# EAGLE board MOD1600-pan (EAGLE 7.2.0)
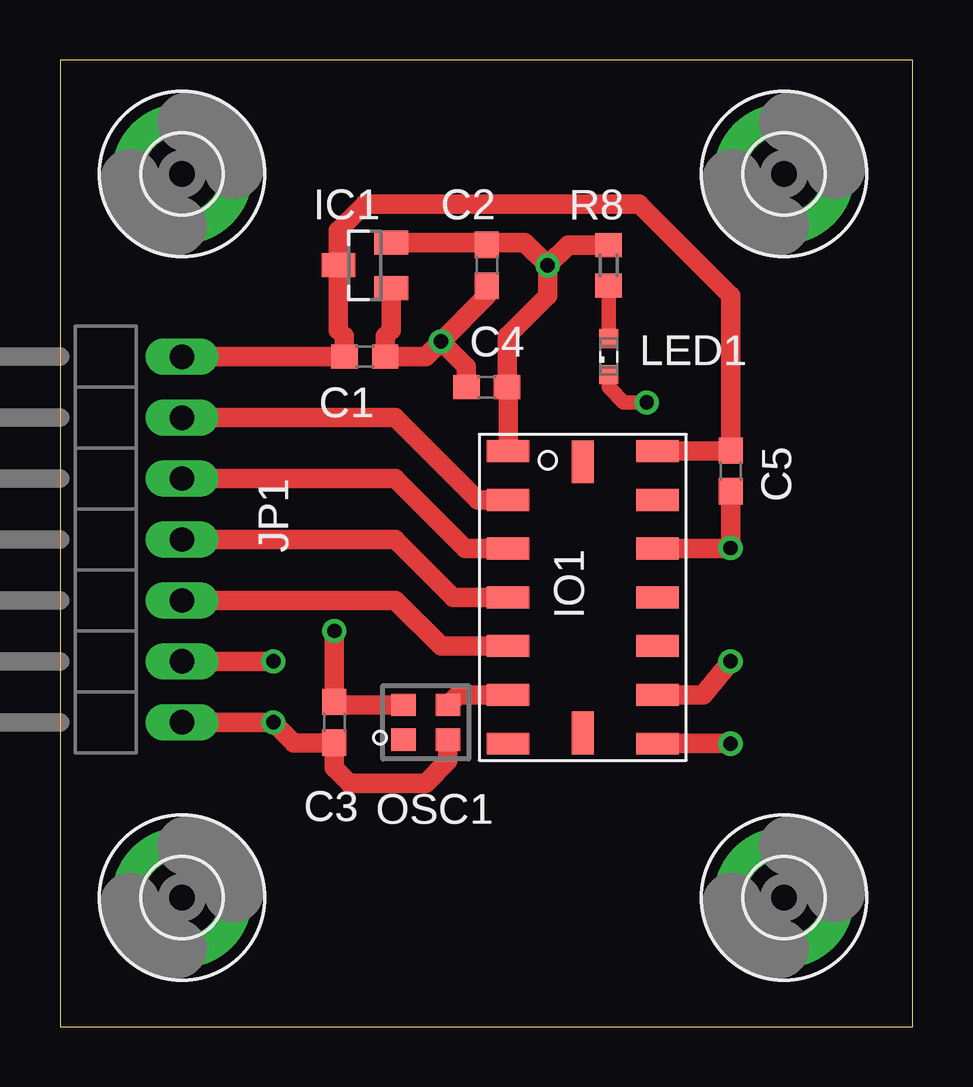
[diagram p0: board, top side]
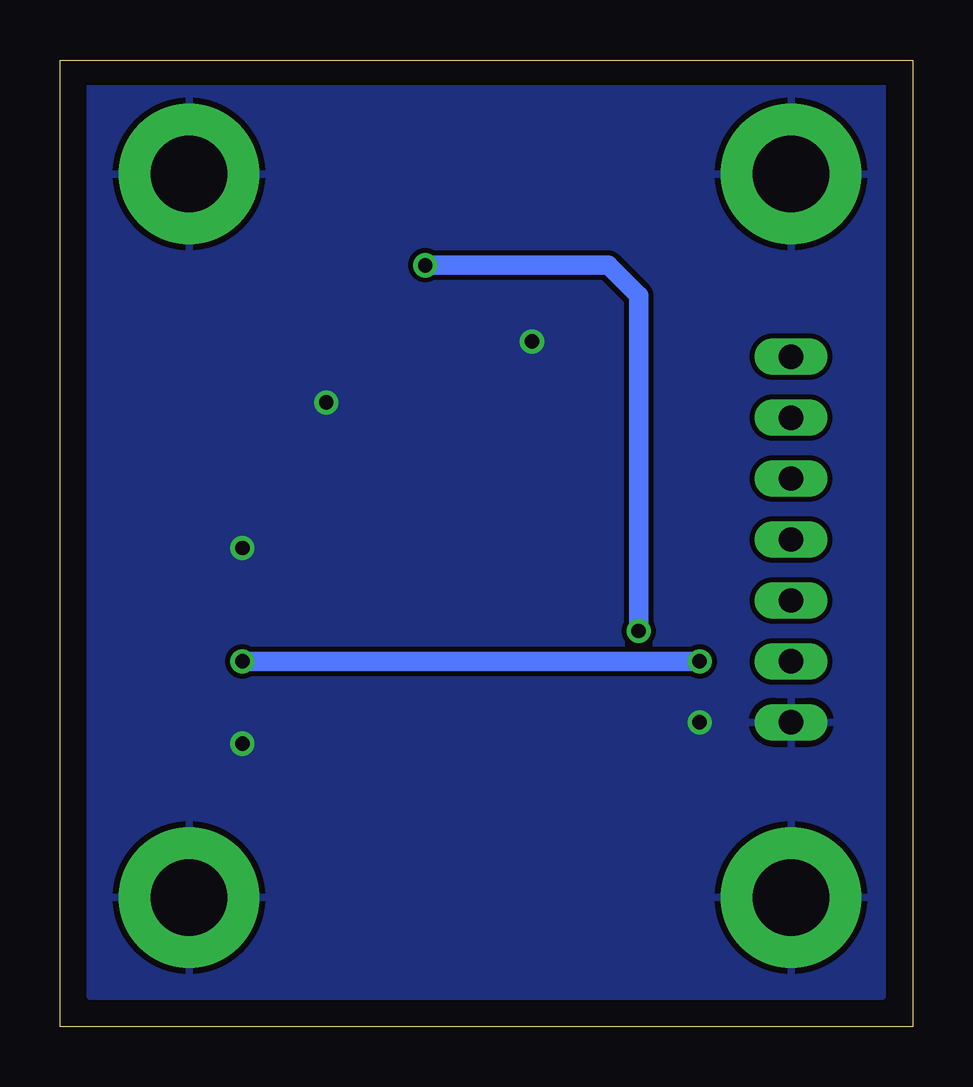
[diagram p1: board, bottom side, seen from below]

Size 35.54 x 40.31 mm. Coordinates in mm from the lower left corner, seen from the top.
Outline: 0,0 35.54,0 35.54,40.31 0,40.31 0,0
Copper layers (1*16): Top 0.035mm / dielectric 1.5mm / Bottom 0.035mm
Design rules "default": minimum track width 10mil, minimum drill 24mil, track to track 8mil, track to pad 8mil, pad to pad 8mil, via to via 8mil, smd to smd 8mil, copper to edge 40mil, drill to drill 8mil, minimum pad ring 10mil, minimum via ring 8mil, stop-mask expansion 4mil, vias tented up to drill 0mil, thermal gap 10mil

## Footprints (pad centres in the part's own frame; a part is rotated, then mirrored left to right if it is on the bottom)
C0603 = smd 1.1 x 1: 1 -0.85,0; 2 0.85,0
3,2-PAD = drill 3.2 pad 5.842: B3,2 0,0
SOT23 = smd 1 x 1.4: 1 -0.95,-1.1; 2 0.95,-1.1; 3 0,1.1
LGA_MOD1600 = smd 1.778 x 0.914: P1 -2.921,6.223; P2 -2.921,4.191; P3 -2.921,2.159; P4 -2.921,0.127; P5 -2.921,-1.905; P6 -2.921,-3.937; P7 -2.921,-5.969; P9 3.302,-5.969; P10 3.302,-3.937; P11 3.302,-1.905; P12 3.302,0.127; P13 3.302,2.159; P14 3.302,4.191; P15 3.302,6.223 | smd 0.914 x 1.778: P8 0.191,-5.524; P16 0.191,5.779
1X07/90 = drill 1.016 long: 1 -7.62,-3.81; 2 -5.08,-3.81; 3 -2.54,-3.81; 4 0,-3.81; 5 2.54,-3.81; 6 5.08,-3.81; 7 7.62,-3.81
SML0603 = smd 0.8 x 0.8: A 0.75,0; C -0.75,0
SMD_OSC = smd 1.016 x 0.925: 1 -0.925,-0.724; 2 0.925,-0.724; 3 0.925,0.724; 4 -0.925,0.724
R0603 = smd 1 x 1.1: 1 -0.85,0; 2 0.85,0

## Placement (x,y rotation side)
C1  2u2  [C0603]  12.7,27.94 0 top
C2  2u2  [C0603]  17.78,31.75 270 top
C3  100n  [C0603]  11.43,12.7 270 top
C4  100n  [C0603]  17.78,26.67 180 top
C5  100n  [C0603]  27.94,23.18 270 top
H1  MOUNT-PAD-ROUND3.2  [3,2-PAD]  30.16,35.56 0 top
H2  MOUNT-PAD-ROUND3.2  [3,2-PAD]  30.16,5.4 0 top
H3  MOUNT-PAD-ROUND3.2  [3,2-PAD]  5.08,5.4 0 top
H4  MOUNT-PAD-ROUND3.2  [3,2-PAD]  5.08,35.56 0 top
IC1  MCP1703CB  [SOT23]  12.7,31.75 90 top
IO1  [LGA_MOD1600]  21.59,17.78 0 top
JP1  [1X07/90]  1.27,20.32 90 top
LED1  [SML0603]  22.86,27.94 90 top
OSC1  KC2520B32K7680CM2E00  [SMD_OSC]  15.24,12.7 0 top
R8  220R  [R0603]  22.86,31.75 90 top

## Library data of the parts
C1-C5 R8 = rcl
H1-H4 = holes
IC1 = linear
IO1 OSC1 = gyro
JP1 = pinhead
LED1 = led

## Nets
+3V3: C2.1 C3.1 C4.1 IC1.2 IO1.P1 OSC1.4 R8.2
+5V: C1.1 C5.1 IC1.3 IO1.P15 JP1.7
CLKIN: IO1.P6 OSC1.3
DRDY: IO1.P10 JP1.2
GND: C1.2 C2.2 C3.2 C4.2 C5.2 H1.B3,2 H2.B3,2 H3.B3,2 H4.B3,2 IC1.1 IO1.P9 IO1.P13 JP1.1 LED1.C OSC1.2
N$9: LED1.A R8.1
NCS: IO1.P2 JP1.6
SCLK: IO1.P5 JP1.3
SDI: IO1.P4 JP1.4
SDO: IO1.P3 JP1.5

## Tracks (layer width: path | path; a pad name or v marks a point on that pad's centre or on a via)
+3V3  (via drill 0.6)
  Top 0.813: v11.43,16.51 C3.1 11.64,13.55 11.52,13.42 OSC1.4 | IO1.P1 18.67,26.63 C4.1 18.63,28.79 20.32,30.48 v20.32,31.75 | R8.2 21.17,32.6 v20.32,31.75 | 17.68,32.7 19.37,32.7 v20.32,31.75 | IC1.2 17.68,32.7 | 17.68,32.7 C2.1
  Bottom 0.813: v11.43,16.51 11.43,30.48 12.7,31.75 v20.32,31.75
+5V
  Top 0.813: JP1.7 C1.1 11.85,28.79 11.6,29.04 IC1.3 11.6,33.19 12.7,34.29 24.13,34.29 27.94,30.48 C5.1 27.92,24 IO1.P15
CLKIN
  Top 0.813: IO1.P6 16.58,13.84 OSC1.3
DRDY  (via drill 0.6)
  Top 0.813: JP1.2 v8.89,15.24 | IO1.P10 26.8,13.84 v27.94,15.24
  Bottom 0.813: v8.89,15.24 v27.94,15.24
GND  (via drill 0.6)
  Top 0.61: LED1.C 22.86,26.67 23.5,26.04 v24.45,26.04
  Top 0.813: OSC1.2 16.16,11.09 15.24,10.16 12.06,10.16 11.43,10.79 C3.2 9.74,11.85 v8.89,12.7 JP1.1 | C5.2 v27.94,19.96 27.91,19.94 IO1.P13 | v15.88,28.57 15.24,27.94 C1.2 13.55,28.79 13.8,29.04 IC1.1 | C2.2 17.78,30.48 v15.88,28.57 | C4.2 16.93,27.52 v15.88,28.57 | IO1.P9 v27.94,11.81
  pour Bottom: 1.27,39.37 1.27,1.27 34.29,1.27 34.29,39.37
N$9
  Top 0.61: R8.1 LED1.A
NCS
  Top 0.813: IO1.P2 17.4,21.97 13.97,25.4 JP1.6
SCLK
  Top 0.813: IO1.P5 15.88,15.88 13.97,17.78 JP1.3
SDI
  Top 0.813: IO1.P4 16.38,17.91 13.97,20.32 JP1.4
SDO
  Top 0.813: IO1.P3 16.89,19.94 13.97,22.86 JP1.5

## Text on the board
_tNames: IC1 | R8 | C2 | C4 | LED1 | C1 | JP1 | C5 | IO1 | C3 | OSC1